# EAGLE board ttl board MK2 (EAGLE 7.5.0)
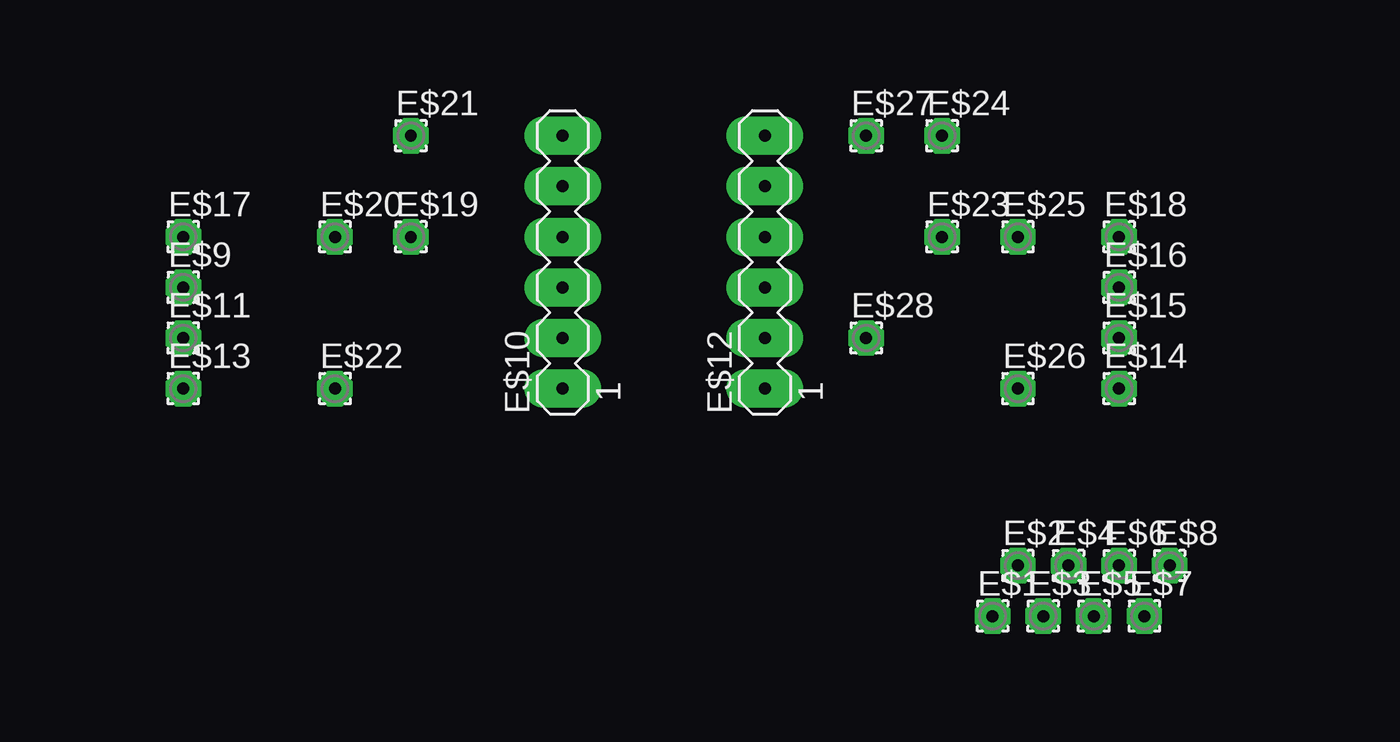
[diagram p0: board, top side]
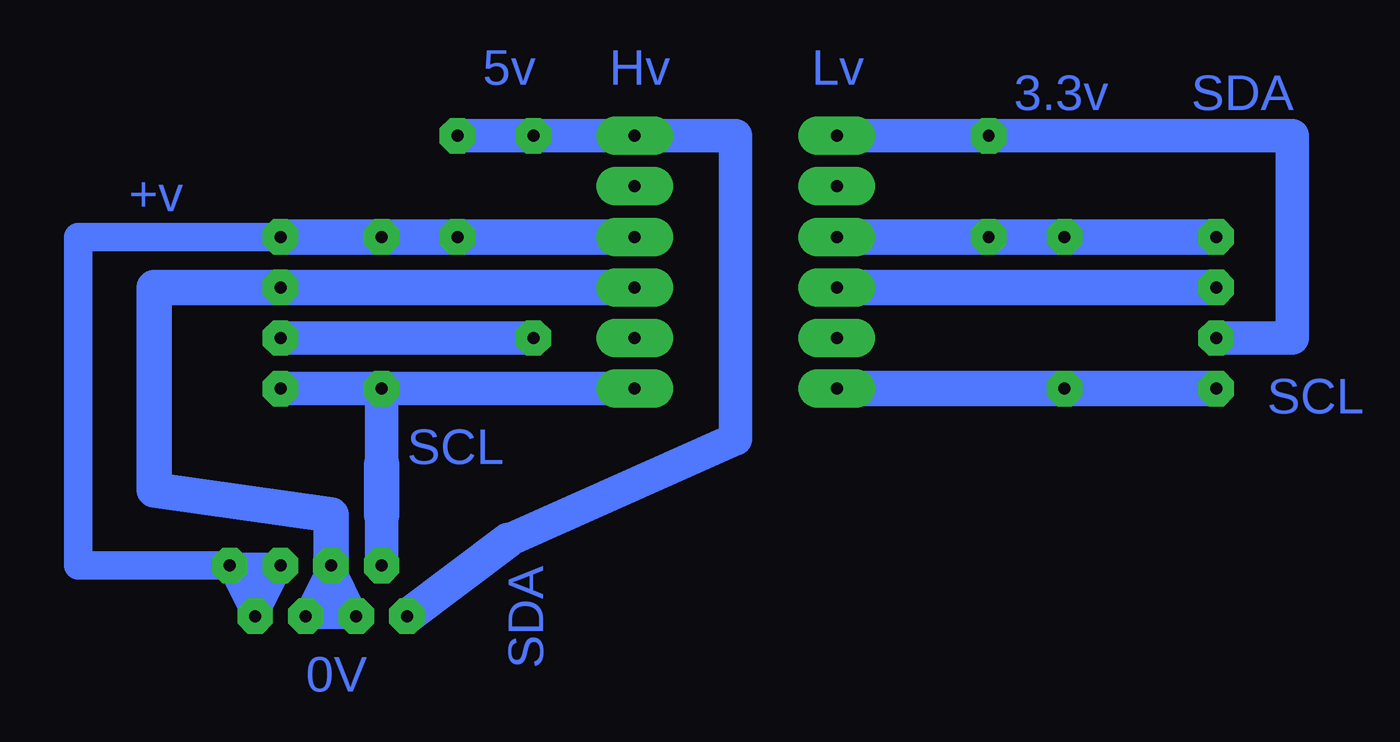
[diagram p1: board, bottom side, seen from below]

No outline drawn. Coordinates in mm, seen from the top.
Copper layers (1*16): Top 0.035mm / dielectric 1.5mm / Bottom 0.035mm
Design rules "default": minimum track width 10mil, minimum drill 24mil, track to track 8mil, track to pad 8mil, pad to pad 8mil, via to via 8mil, smd to smd 8mil, copper to edge 40mil, drill to drill 8mil, minimum pad ring 10mil, minimum via ring 8mil, stop-mask expansion 4mil, vias tented up to drill 0mil, thermal gap 10mil

## Footprints (pad centres in the part's own frame; a part is rotated, then mirrored left to right if it is on the bottom)
1,6/0,8 = drill 0.6 pad 1.778 octagon: 1 0,0
MA06-1 = drill 0.6 pad 1.93 long: 1 -6.35,0; 2 -3.81,0; 3 -1.27,0; 4 1.27,0; 5 3.81,0; 6 6.35,0

## Placement (x,y rotation side)
E$1  [1,6/0,8]  49.53,2.54 0 top
E$2  [1,6/0,8]  50.8,5.08 0 top
E$3  [1,6/0,8]  52.07,2.54 0 top
E$4  [1,6/0,8]  53.34,5.08 0 top
E$5  [1,6/0,8]  54.61,2.54 0 top
E$6  [1,6/0,8]  55.88,5.08 0 top
E$7  [1,6/0,8]  57.15,2.54 0 top
E$8  [1,6/0,8]  58.42,5.08 0 top
E$9  [1,6/0,8]  8.89,19.05 0 top
E$10  [MA06-1]  27.94,20.32 90 top
E$11  [1,6/0,8]  8.89,16.51 0 top
E$12  [MA06-1]  38.1,20.32 90 top
E$13  [1,6/0,8]  8.89,13.97 0 top
E$14  [1,6/0,8]  55.88,13.97 0 top
E$15  [1,6/0,8]  55.88,16.51 0 top
E$16  [1,6/0,8]  55.88,19.05 0 top
E$17  [1,6/0,8]  8.89,21.59 0 top
E$18  [1,6/0,8]  55.88,21.59 0 top
E$19  [1,6/0,8]  20.32,21.59 0 top
E$20  [1,6/0,8]  16.51,21.59 0 top
E$21  [1,6/0,8]  20.32,26.67 0 top
E$22  [1,6/0,8]  16.51,13.97 0 top
E$23  [1,6/0,8]  46.99,21.59 0 top
E$24  [1,6/0,8]  46.99,26.67 0 top
E$25  [1,6/0,8]  50.8,21.59 0 top
E$26  [1,6/0,8]  50.8,13.97 0 top
E$27  [1,6/0,8]  43.18,26.67 0 top
E$28  [1,6/0,8]  43.18,16.51 0 top

## Library data of the parts
E$1-E$28 = cls

## Nets
S$1: E$6.1 E$7.1 E$8.1 E$12.4 E$18.1
S$2: E$2.1 E$12.1 E$14.1 E$26.1
S$3: E$10.4 E$17.1
S$4: E$3.1 E$4.1 E$5.1 E$12.3 E$16.1
S$5: E$9.1 E$10.3
S$6: E$10.6 E$11.1 E$21.1
S$7: E$10.1 E$13.1
S$8: E$15.1
S$9: E$1.1 E$12.6 E$24.1

## Tracks (layer width: path | path; a pad name or v marks a point on that pad's centre or on a via)
S$1
  Bottom 1.27: 57.15,5.08 E$6.1 E$7.1 | 57.15,5.08 E$8.1 E$7.1 | 57.15,5.08 E$7.1
  Bottom 1.422: E$8.1 66.04,5.08 66.04,21.59 E$18.1
  Bottom 1.778: E$12.4 E$18.1
S$2
  Bottom 1.676: 50.8,7.62 E$2.1 | 50.8,10.16 E$26.1 E$14.1 E$12.1
  Bottom 1.778: 50.8,7.62 50.8,10.16
S$3
  Bottom 1.778: E$17.1 E$10.4
S$4
  Bottom 1.27: E$3.1 E$4.1 E$5.1 E$3.1 | E$3.1 53.34,3.81
  Bottom 1.778: E$4.1 53.34,7.62 62.23,8.89 62.23,19.05 E$16.1 E$12.3
S$5
  Bottom 1.778: E$9.1 E$10.3
S$6
  Bottom 1.676: E$10.6 E$21.1 5.08,26.67 5.08,16.51 E$11.1
S$7
  Bottom 1.778: E$13.1 E$10.1
S$8
  Bottom 1.676: E$15.1 43.18,16.51
S$9
  Bottom 1.676: 44.45,6.35 33.02,11.43 33.02,26.67 E$12.6 E$24.1
  Bottom 1.778: E$1.1 44.45,6.35

## Text on the board
Bottom: Lv | Hv | 5v | SDA | 3.3v | +v | SCL | SCL | SDA | 0V